# EAGLE board schematics (EAGLE 9.1.3)
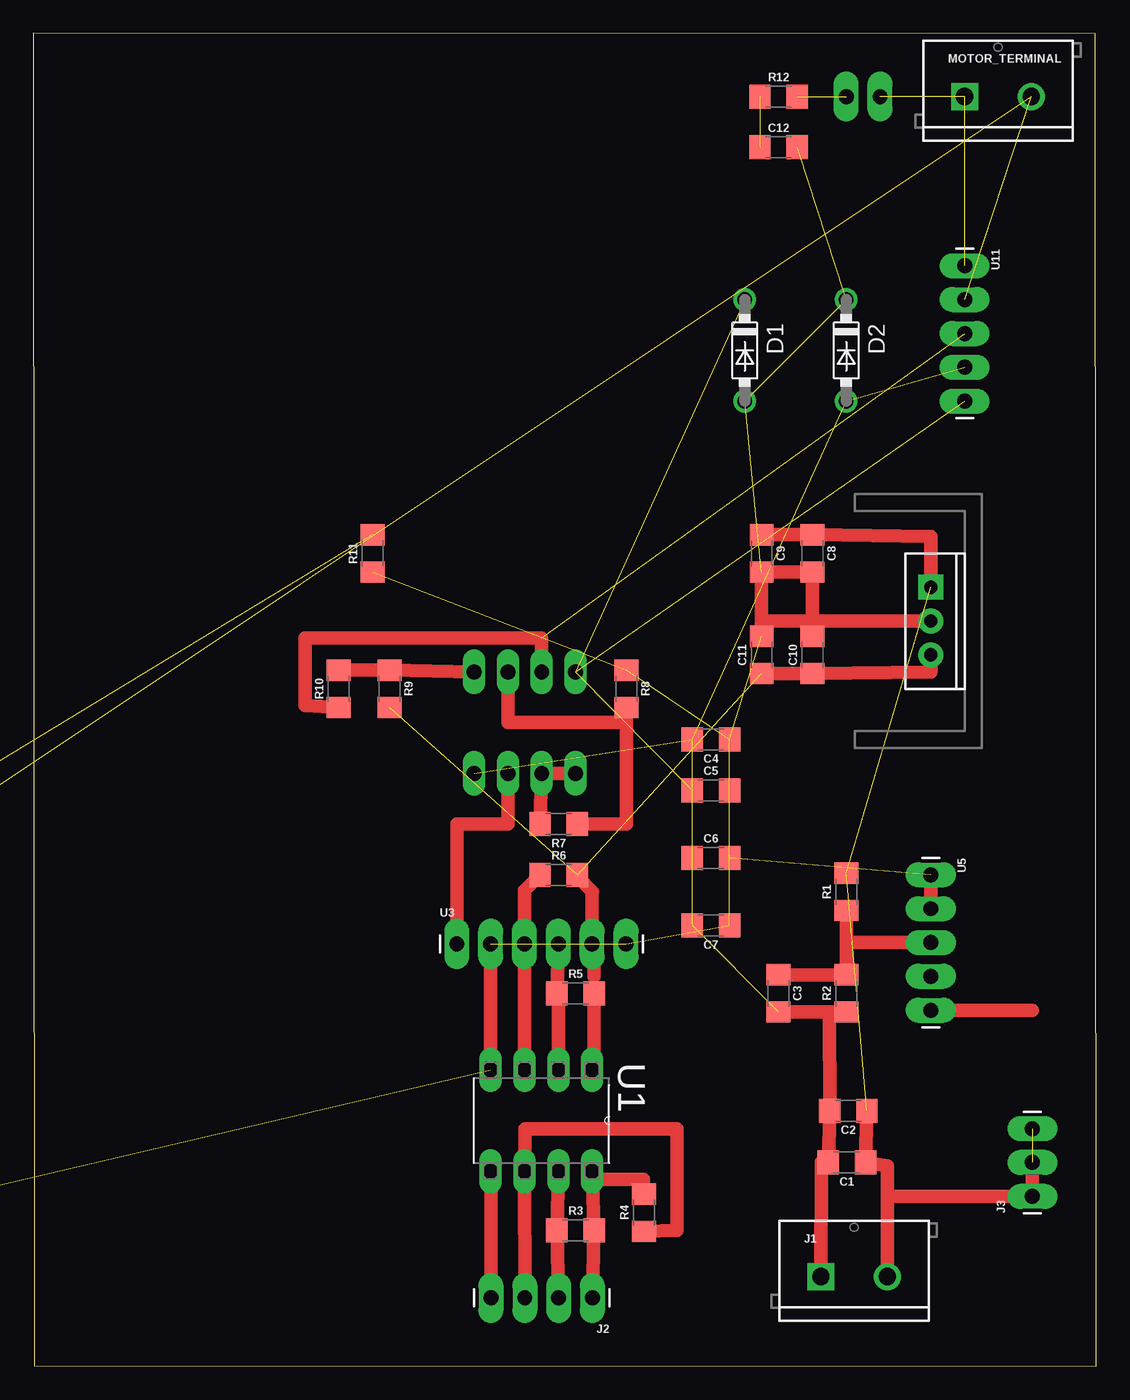
[diagram p0: board, top side]
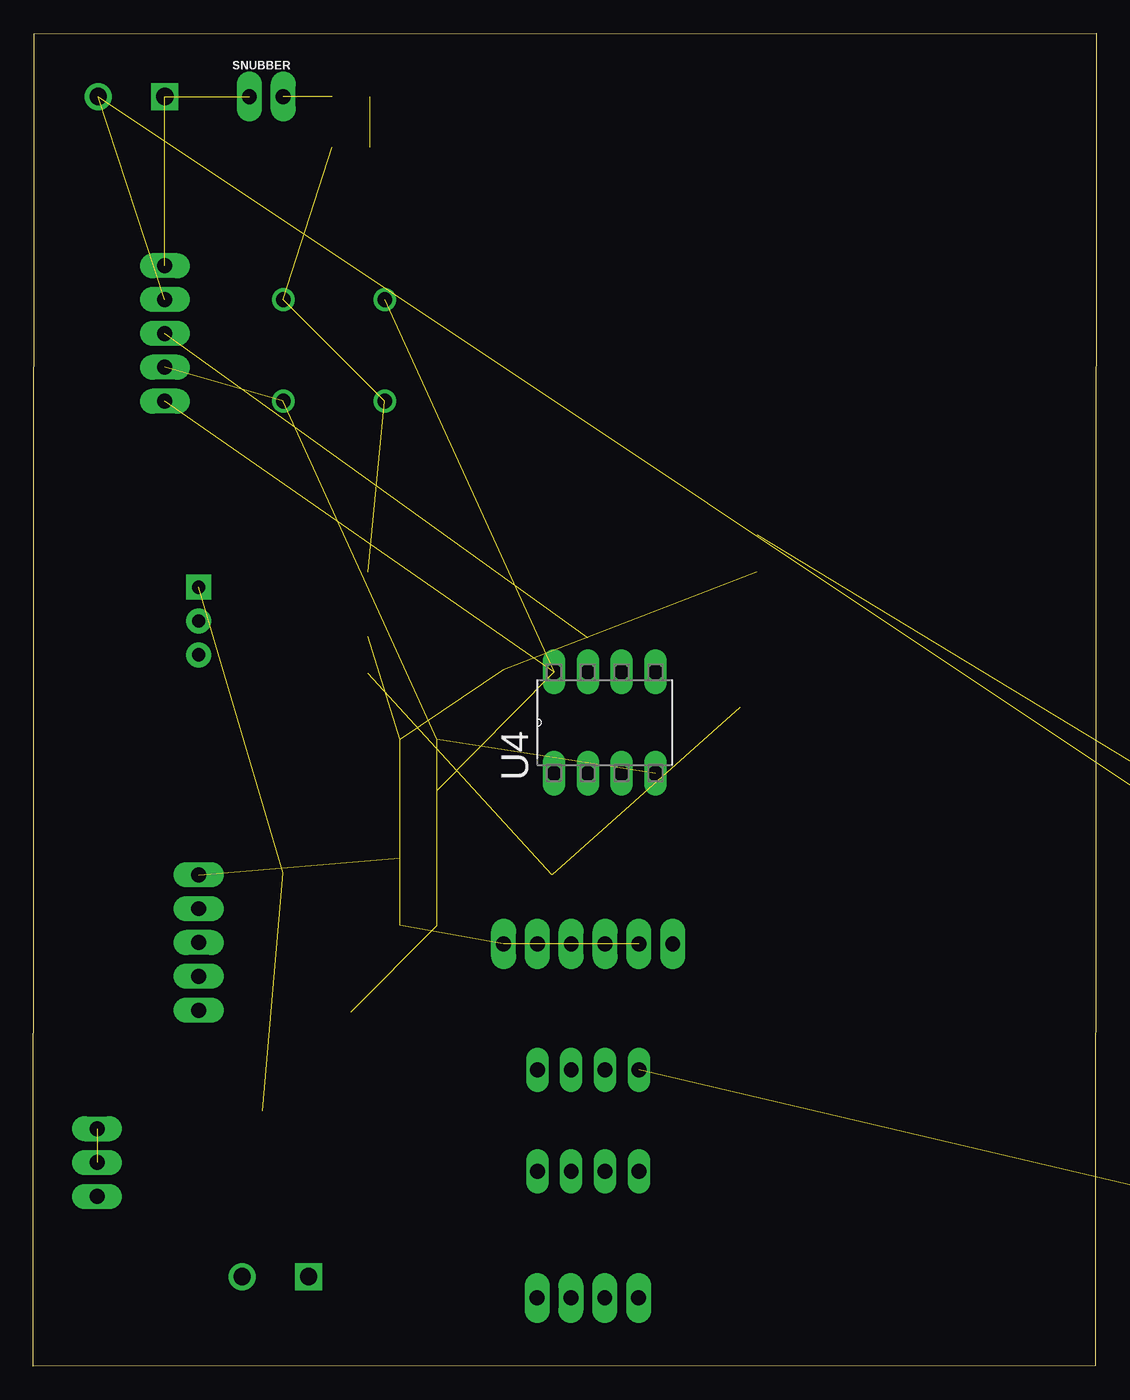
[diagram p1: board, bottom side, seen from below]

Size 79.79 x 100.05 mm. Coordinates in mm from the lower left corner, seen from the top.
Outline: 0.07,0.05 79.79,0 79.72,100 0,100.05 0.07,0.05
Copper layers (1*16): Top 0.035mm / dielectric 1.5mm / Bottom 0.035mm
Design rules "default": minimum track width 6mil, minimum drill 0.35mm, track to track 6mil, track to pad 6mil, pad to pad 6mil, via to via 6mil, smd to smd 6mil, copper to edge 40mil, drill to drill 6mil, minimum pad ring 10mil, minimum via ring 8mil, stop-mask expansion 4mil, vias tented up to drill 0mil, thermal gap 10mil

## Footprints (pad centres in the part's own frame; a part is rotated, then mirrored left to right if it is on the bottom)
1206 = smd 1.6 x 1.8: 1 -1.4,0; 2 1.4,0
DO41-7.6 = drill 1.1 pad 1.7: A 3.81,0; C -3.81,0
SCREWTERMINAL-5MM-2 = drill 1.3 pad 2.032 square: 1 0,0 | drill 1.3 pad 2.032: 2 5,0
1X04_LONGPADS = drill 1.118 pad 1.88 long: 1 0,0; 2 2.54,0; 3 5.08,0; 4 7.62,0
1X03_LONGPADS = drill 1.118 pad 1.88 long: 1 0,0; 2 2.54,0; 3 5.08,0
1X02_LONGPADS = drill 1.118 pad 1.88 long: 1 0,0; 2 2.54,0
DIP254P762X508-8 = drill 1.118 long: 1 -7.62,7.62; 2 -7.62,5.08; 3 -7.62,2.54; 4 -7.62,0; 5 0,0; 6 0,2.54; 7 0,5.08; 8 0,7.62
TO220-IGO = drill 1 pad 1.88: GND 0,0; OUT 2.54,0 | drill 1 pad 1.88 square: IN -2.54,0
1X06_LONGPADS = drill 1.118 pad 1.88 long: 1 0,0; 2 2.54,0; 3 5.08,0; 4 7.62,0; 5 10.16,0; 6 12.7,0
1X05_LONGPADS = drill 1.118 pad 1.88 long: 1 0,0; 2 2.54,0; 3 5.08,0; 4 7.62,0; 5 10.16,0

## Placement (x,y rotation side)
C1  1.0uF  [1206]  61.08,15.29 180 top
C2  100nF  [1206]  61.18,19.17 180 top
C3  100nF  [1206]  55.92,27.99 270 top
C4  100nF  [1206]  50.87,47.04 180 top
C5  1uF  [1206]  50.87,43.23 0 top
C6  100nF  [1206]  50.87,38.15 0 top
C7  1uF  [1206]  50.87,33.07 180 top
C8  1.0uF  [1206]  58.49,61.01 270 top
C9  100nF  [1206]  54.68,61.01 270 top
C10  1.0uF  [1206]  58.49,53.39 90 top
C11  100nF  [1206]  54.68,53.39 90 top
C12  1n  [1206]  55.95,91.49 0 top
D1  1N5819-B  [DO41-7.6]  53.41,76.25 270 top
D2  1N5819-B  [DO41-7.6]  61.03,76.25 270 top
J1  [SCREWTERMINAL-5MM-2]  59.12,6.72 0 top
J2  [1X04_LONGPADS]  41.98,5.13 180 top
J3  [1X03_LONGPADS]  75,12.75 90 top
J5  Jumper  [1X02_LONGPADS]  -64.7,3.86 0 top  (outside the outline)
J6  Jumper  [1X02_LONGPADS]  -71.05,3.86 0 top  (outside the outline)
J7  Jumper  [1X02_LONGPADS]  -77.4,-6.3 0 top  (outside the outline)
J9  Jumper  [1X02_LONGPADS]  -90.1,-6.3 0 top  (outside the outline)
MOTOR_TERMINAL  [SCREWTERMINAL-5MM-2]  69.92,95.3 0 top
R1  1K  [1206]  61.03,35.61 90 top
R2  1K  [1206]  61.03,27.99 90 top
R3  1k  [1206]  40.71,10.21 0 top
R4  1k  [1206]  45.84,11.53 90 top
R5  1k  [1206]  40.71,27.99 0 top
R6  1k  [1206]  39.44,36.88 0 top
R7  1K  [1206]  39.44,40.69 180 top
R8  2K  [1206]  44.52,50.85 270 top
R9  2K  [1206]  26.74,50.85 270 top
R10  2K  [1206]  22.93,50.85 90 top
R11  0R01  [1206]  25.47,61.01 90 top
R12  10  [1206]  55.95,95.3 0 top
R13  0R1  [1206]  -69.78,-2.49 0 top  (outside the outline)
R14  1R0  [1206]  -69.78,-7.57 0 top  (outside the outline)
SNUBBER  Jumper  [1X02_LONGPADS]  63.57,95.3 0 bottom
U1  ISO1541  [DIP254P762X508-8]  34.33,14.63 270 top
U2  [TO220-IGO]  67.38,55.93 270 top
U3  MCP4725  [1X06_LONGPADS]  31.79,31.7 0 top
U4  LM833N  [DIP254P762X508-8]  33.09,52.12 90 bottom
U5  OPA549  [1X05_LONGPADS]  67.38,36.88 270 top
U11  OPA549  [1X05_LONGPADS]  69.92,82.6 270 top

## Library data of the parts
C1-C12 = SparkFun-Capacitors; PROD_ID: CAP-09822
D1 D2 = diode
J1 MOTOR_TERMINAL = SparkFun-Connectors; SF_SKU: PRT-08432
J2 = SparkFun-Connectors; PROD_ID: CONN-09696
J3 J5-J7 J9 SNUBBER = SparkFun-Connectors
R1-R14 = SparkFun-Resistors
U1 U3 U5 U11 = OPA
U2 = SparkFun-IC-Power
U4 = LM833N; AVAILABILITY: Unavailable; DESCRIPTION: Dual Audio Operational Amplifier 8-PDIP -40 to 85; MF: Texas Instruments; MP: LM833N; PACKAGE: DIP-8 Texas Instruments; PRICE: None

## Nets
5V: C10.1 C11.1 R5.2 R6.2 R9.2 U1.1 U2.OUT U3.5
AGND: U5.4
BIASED_VOLTAGE: U3.1 U4.3
DAC_SCL: R6.1 U1.3 U3.3
DAC_SDA: R5.1 U1.2 U3.4
GND: C4.1 C5.2 C6.2 C7.1 C8.2 C9.2 C10.2 C11.2 C12.2 D1.A D2.C R8.1 R11.1 R13.1 R14.1 U1.4 U2.GND U3.2 U3.6 U5.1 U5.2
GND-ISO: J2.4 U1.5
N$1: C3.1 R1.1 R2.2 U5.3
N$2: R12.2 SNUBBER.2
N$3: J2.2 R3.1 U1.7
N$4: J2.3 R4.1 U1.6
N$5: R7.2 U4.1 U4.2
N$6: R7.1 R8.2 U4.6
N$7: R9.1 R10.2 U4.5
N$9: MOTOR_TERMINAL.1 SNUBBER.1 U11.1
N$10: C12.1 R12.1
N$11: J7.1 J9.1 R14.2
N$12: J5.2 J6.2 J7.2 J9.2 MOTOR_TERMINAL.2 U11.2
N$14: J5.1 R13.2
N$15: J6.1 R11.2
UNBIASED_VOLTAGE: R10.1 U4.7 U11.3
VCC-ISO: J2.1 R3.2 R4.2 U1.8
VDD: C5.1 C6.1 D1.C U4.8 U11.5
VDDA: U5.5
VNEG: C1.2 C2.2 C3.2 C4.2 C7.2 D2.A J1.1 R2.1 U4.4 U11.4
VPOS: C1.1 C2.1 C8.1 C9.1 J1.2 J3.1 J3.2 J3.3 R1.2 U2.IN

## Tracks (layer width: path | path; a pad name or v marks a point on that pad's centre or on a via)
5V  (2 unrouted)
  Top 0.508: R6.2 40.84,36.75 | 41.98,35.61 41.95,35.58 | U3.5 42.11,31.54 | 42.11,29.26 R5.2 | 42.11,22.4 U1.1 | 42.11,29.26
  Top 1.016: 40.84,36.75 41.98,35.61 | 41.95,35.58 U3.5 | 42.11,31.54 42.11,29.26 | R5.2 42.11,22.4 | C11.1 C10.1 67.38,52.12 U2.OUT
BIASED_VOLTAGE
  Top 1.016: U3.1 31.82,40.69 35.63,40.69 U4.3
DAC_SCL
  Top 1.016: U1.3 U3.3 36.87,35.71 R6.1
DAC_SDA
  Top 0.508: 39.41,28.09 R5.1 | 39.31,22.35 U1.2
  Top 1.016: U1.2 39.41,28.09 | R5.1 U3.4
GND  (14 unrouted)
  Top 1.016: U1.4 U3.2 | U2.GND 58.49,55.93 | 58.49,55.93 54.68,55.93 C11.2 C9.2 C8.2 58.49,55.93 | C10.2 58.49,55.93 | U5.1 U5.2
GND-ISO
  Top 1.016: J2.4 34.36,14.6 U1.5
N$1
  Top 1.016: C3.1 R2.2 61.03,31.8 | 61.03,31.8 R1.1 | U5.3 61.03,31.8
N$2  (1 unrouted)
N$3
  Top 1.016: J2.2 R3.1 U1.7
N$4
  Top 1.016: J2.3 U1.6 36.9,17.83 48.33,17.83 48.33,10.21 R4.1
N$5
  Top 1.016: U4.1 U4.2 R7.2
N$6
  Top 1.016: R7.1 44.52,40.69 44.52,48.31 | U4.6 35.63,48.31 44.52,48.31 | 44.52,48.31 R8.2
N$7
  Top 1.016: R10.2 R9.1 U4.5
N$9  (2 unrouted)
N$10  (1 unrouted)
N$11  (2 unrouted)
N$12  (5 unrouted)
N$14  (1 unrouted)
N$15  (1 unrouted)
UNBIASED_VOLTAGE  (1 unrouted)
  Top 1.016: U4.7 38.17,54.66 20.39,54.66 20.39,49.58 R10.1
VCC-ISO
  Top 0.508: 41.98,14.65 U1.8
  Top 1.016: J2.1 R3.2 42,14.02 | 42,14.02 41.98,14.65 | R4.2 45.79,14.02 42,14.02
VDD  (4 unrouted)
VDDA
  Top 1.016: 75,26.72 U5.5
VNEG  (5 unrouted)
  Top 1.016: J1.1 59.17,15.34 C1.2 C2.2 59.76,26.59 | C3.2 59.76,26.59 | 59.76,26.59 R2.1
VPOS  (3 unrouted)
  Top 1.016: U2.IN 67.38,62.28 C8.1 C9.1 | 64.12,12.75 64.12,14.02 64.13,15.03 C1.1 C2.1 | 64.12,12.75 J3.1 J3.2 | J1.2 64.12,12.75